# Altium PCB Power distribution system.PcbDoc
Units mm, origin at the board's own origin, x right, y up, seen from the top; angles counter-clockwise.
Board outline 242.49 x 145.36 mm, 2 copper layers (Top Layer, Bottom Layer), stack 2.57 mm thick; 38 components, 16 nets, 98 pads, 322 vias.
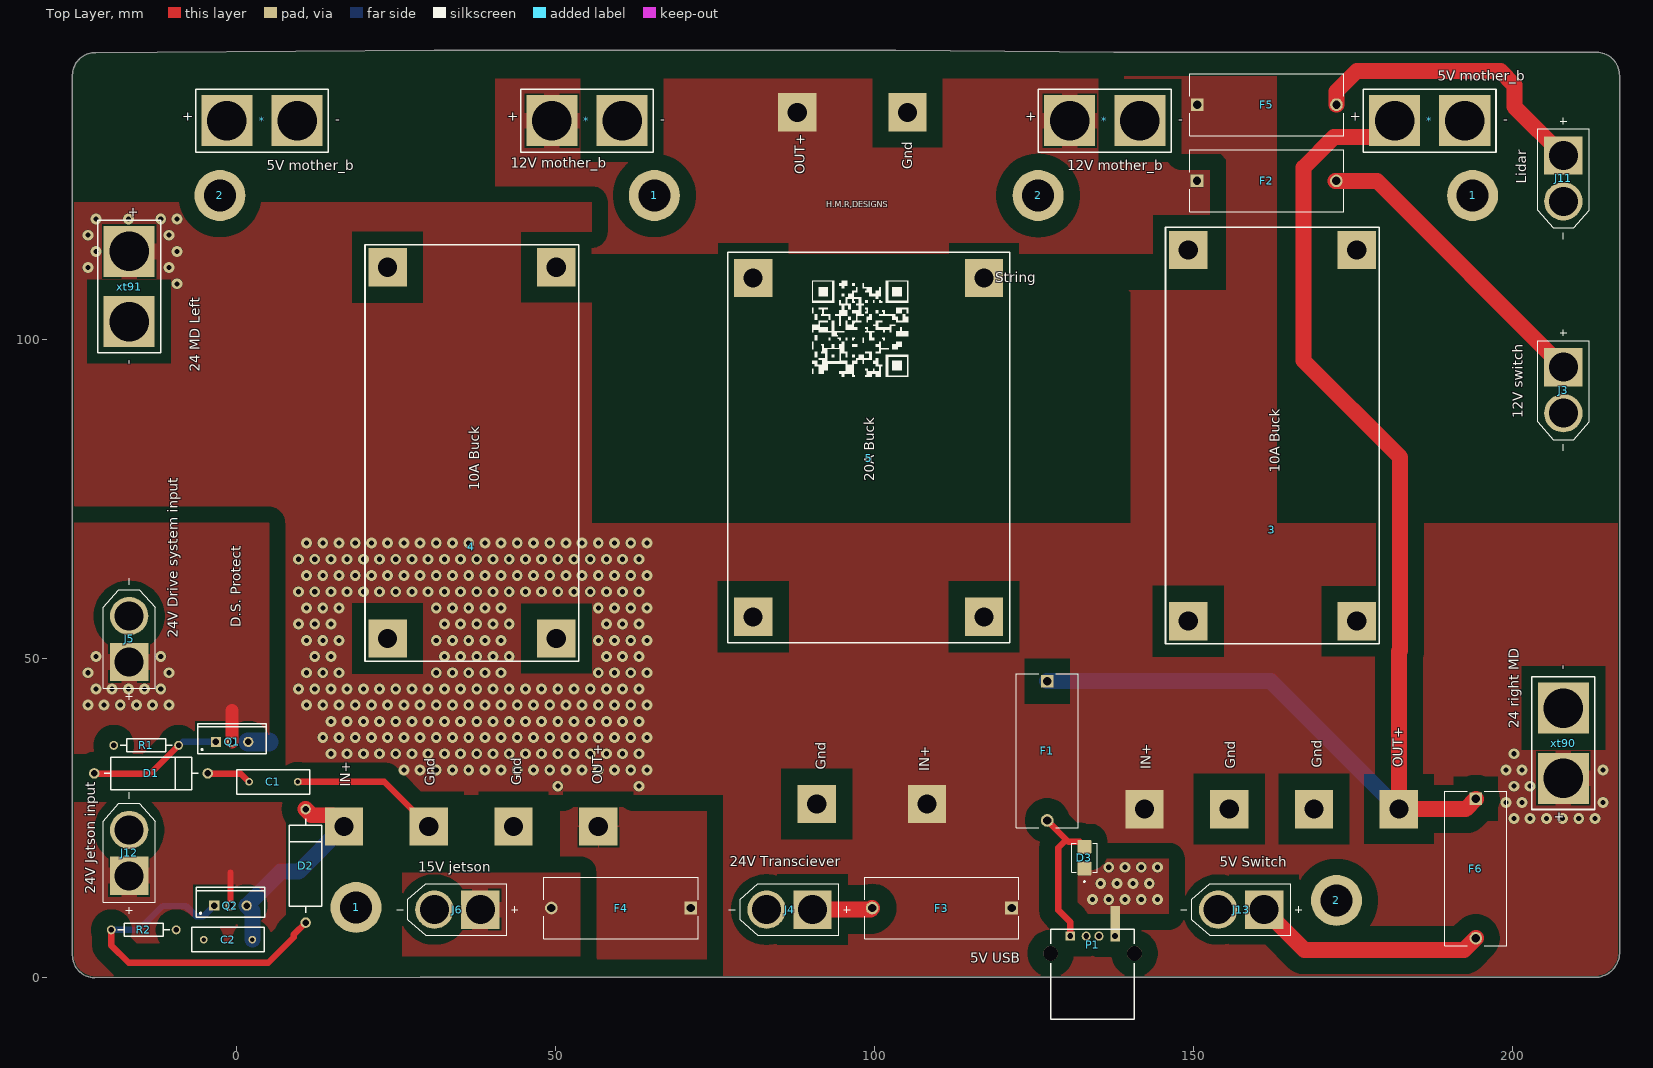
[diagram p0: Top Layer view]
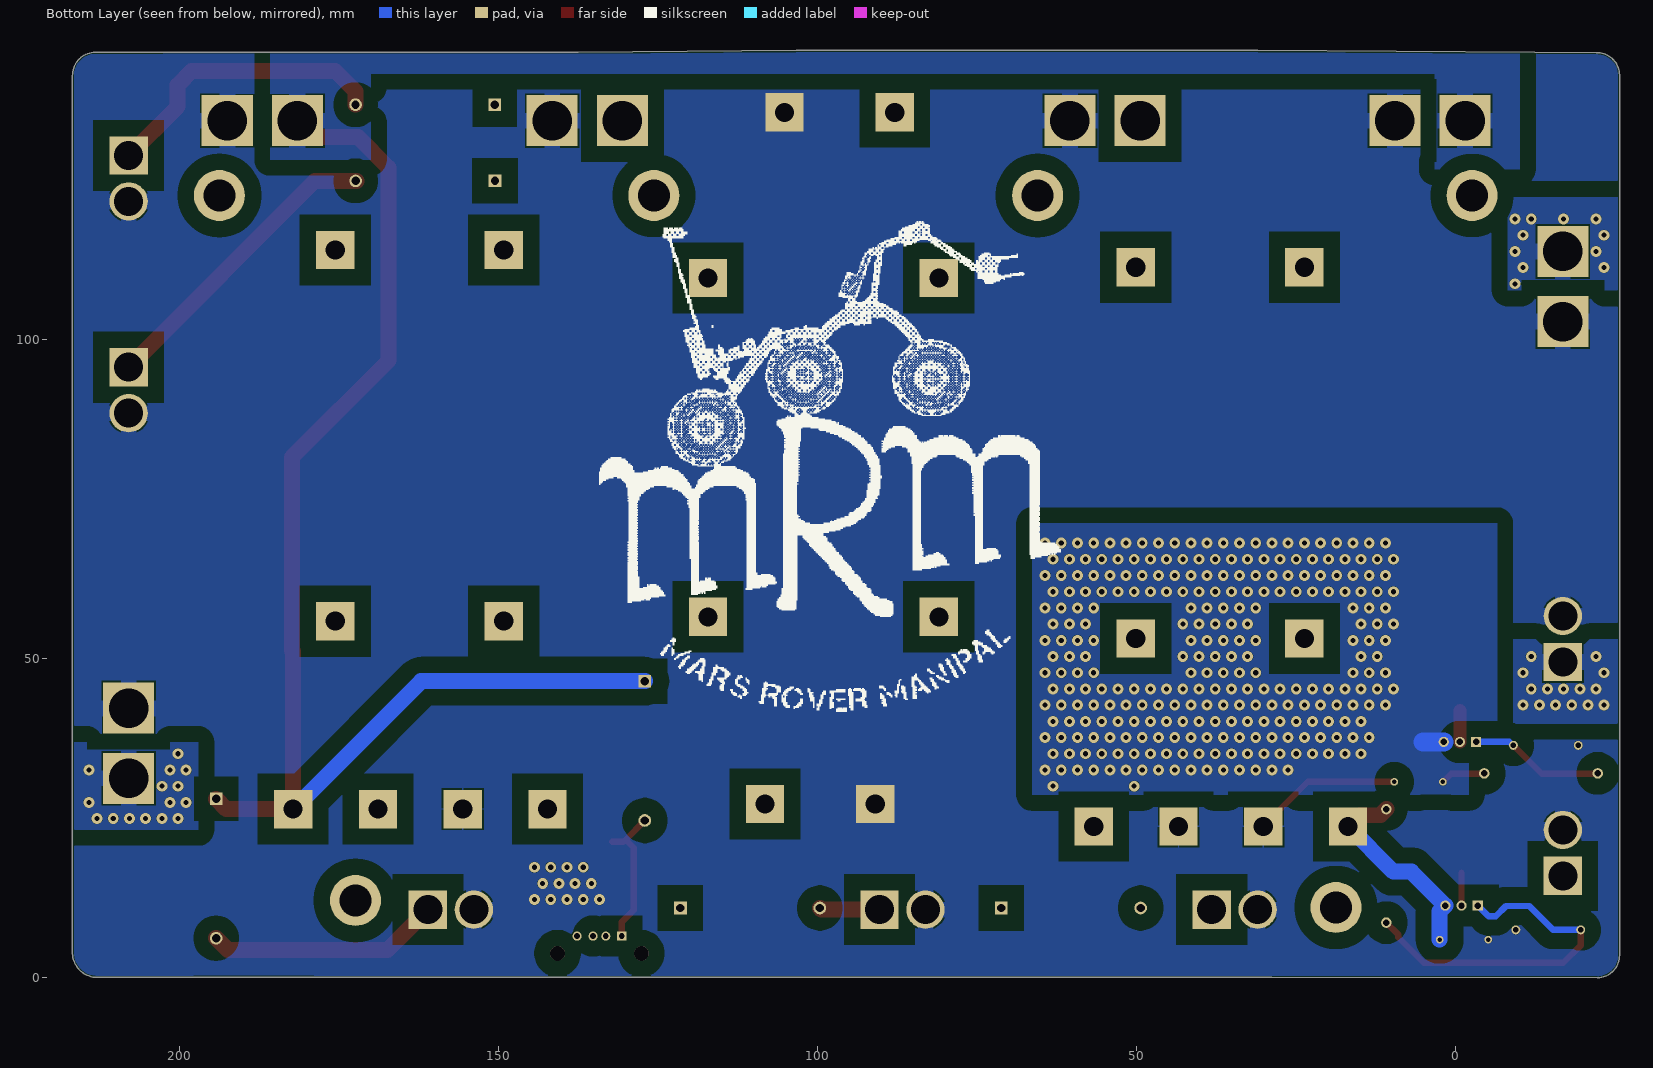
[diagram p1: Bottom Layer view, seen from below]

## Layer stack, top to bottom
Top Solder: solder mask 0.0102, Solder Resist, Dk 3.5
Top Layer: signal copper 0.105
Dielectric 1: dielectric 2.36, FR-4, Dk 4.8
Bottom Layer: signal copper 0.105
Bottom Solder: solder mask 0.0102, Solder Resist, Dk 3.5

## Board outline
-25.781,3.435 ccw(c-22.224,3.435) -22.343,-0.12 28.765,-0.044 178.816,-0.044 196.342,0 197.771,-0.011 202.057,-0.044 212.824,-0.044 ccw(c212.824,3.841) 216.707,3.719 216.701,141.275 ccw(c213.104,141.348) 213.175,144.945 202.438,144.99 179.53,144.99 137.41,144.99 103.253,145.244 30.93,145.244 -12.47,144.99 -22.163,144.898 ccw(c-22.227,141.351) -25.774,141.415

## Design rules (kind name [scope] priority, off if disabled: settings)
BoardOutlineClearance [All] p1: gap=0.254 ignorepadtopadclearanceinfootprint=FALSE except(0: Arc-SplitContinuation Track-SplitContinuation SMDPad-SplitContinuation THPad-SplitContinuation Via-SplitContinuation Fill-SplitContinuation Poly-SplitContinuation Region-SplitContinuation Text-SplitContinuation)
Clearance [All] p1: gap=2.54 ignorepadtopadclearanceinfootprint=FALSE except(0: Arc-Hole Track-Hole SMDPad-Hole THPad-Hole Via-Hole Fill-Hole Poly-Hole Region-Hole Text-Hole; 0.254: Arc-Via Arc-Text Track-Via Track-Text SMDPad-SMDPad SMDPad-THPad SMDPad-Via SMDPad-Text THPad-THPad THPad-Via THPad-Text Via-Via Via-Fill Via-Poly Via-Region Via-Text Fill-Text Poly-Text Region-Text Text-Text)
PlaneClearance [All] p1: clearance=2.54
PlaneConnect [All] p1: planeconnectstyle=Relief reliefexpansion=0.508 reliefentries=4 reliefconductorwidth=2.54 reliefairgap=0.254
PolygonConnect [InNetClass('All Nets') vs InNetClass('All Nets')] p1: connectstyle=Relief reliefconductorwidth=2.54 reliefentries=4 polygonreliefangle="90 Angle" airgapwidth=0.254
RoutingVias [All] p1: holewidth=0.711 width=1.27 viastyle="Through Hole" minholewidth=0.711 minwidth=1.27 maxholewidth=0.711 maxwidth=1.27
SolderMaskExpansion [All] p1: expansion=0.102 istentingtop=FALSE
Width Width_1 [All] p1: maxlimit=42.219 minlimit=1 preferedwidth=1 minimp=50.000000 maximp=50.000000 favimp=50.000000
28 further rules are at their usual default settings.

## Classes and differential pairs
component class Sheet3: 1 2 3 4 5 * C1 C2 D1 D2 D3 F1 F2 F3 F4 F5 F6 J3 J4 J5 J6 J11 J12 J13 P1 Q1 Q2 R1 R2 xt90 xt91

## Components (designator, comment, footprint, x,y, rotation, side; value= is the part's Value field where it differs from the comment)
1 "mountinghole_np" np_mountinghole#1 18.669,10.922 r90 top
1 "mountinghole_np" np_mountinghole#2 196.85,122.511 r90 top
1 "mountinghole_np" np_mountinghole#3 64.262,122.511 r90 top
2 "mountinghole_np" np_mountinghole#1 -2.667,122.511 r90 top
2 "mountinghole_np" np_mountinghole#1 125.585,122.511 r90 top
2 "mountinghole_np" np_mountinghole#4 178.816,12.021 r90 top
3 "Buck 10A" "Buck 10A" 175.514,52.236 r90 top
4 "Buck 10A" "Buck 10A" 50.038,49.533 r90 top locked
5 "Buck 20A" "Buck 20A" 87.828,135.536 r90 top
* "xt90" xt90 136.017,134.239 r0 top
* "xt90" xt90 186.944,134.239 r0 top
* "xt90" xt90 54.864,134.239 r0 top
* "xt90" xt90 3.937,134.239 r0 top
C1 "Cap" RAD-0.3 5.715,30.607 r180 top value=100pF
C2 "Cap" RAD-0.3 -1.397,5.881 r0 top value=100pF
D1 "D Zener" DIODE-0.7 -13.462,31.926 r0 top
D2 "D Zener" DIODE-0.7 10.768,17.438 r90 top
D3 "SMBJ36CA-13-F" DIONM4336X250N 132.842,18.72 r90 top
F1 "4527" FUSE_4527 127,35.472 r270 top
F2 "4527" FUSE_4527 161.4,124.797 r0 top
F3 "4527" FUSE_4527 110.49,10.834 r180 top
F4 "4527" FUSE_4527 60.198,10.834 r180 top
F5 "4527" FUSE_4527 161.417,136.735 r0 top
F6 "4527" FUSE_4527 194.183,17.018 r270 top
J3 "XT60-M" AMASS_XT60-M 207.899,91.992 r270 top
J4 "XT60-M" AMASS_XT60-M 86.614,10.58 r180 top
J5 "XT60-M" AMASS_XT60-M -16.891,53.003 r90 top
J6 "XT60-M" AMASS_XT60-M 34.544,10.58 r180 top
J11 "XT60-M" AMASS_XT60-M 207.899,125.183 r270 top
J12 "XT60-M" AMASS_XT60-M -16.891,19.468 r90 top
J13 "XT60-M" AMASS_XT60-M 157.397,10.58 r180 top
P1 "USB-A1HSW6" OST_USB-A1HSW6 134.112,-0.088 r0 top
Q1 "PMOS-2" TO-220AB -0.762,36.869 r0 top
Q2 "PMOS-2" TO-220AB -1.016,11.215 r0 top
R1 "Res2" AXIAL-0.4 -14.224,36.322 r0 top value=1K
R2 "Res2" AXIAL-0.4 -14.605,7.405 r180 top value=1K
xt90 "xt90" xt90 207.899,36.664 r90 top
xt91 "xt90" xt90 -16.891,108.243 r270 top

## Footprints (in the part's own frame and the unit in brackets; to place one, negate y for a bottom-side part, rotate by r counter-clockwise, add the part's x,y. Pads: shape width x height; smd on the part's side, far side on the other; paste and mask are expansions set on the pad)
AMASS_XT60-M [mm]
  round 6 hole 4.55: N(3.6,0)
  rect 6x6 hole 4.55: P(-3.6,0)
  silkscreen extent -9.5,-4.05 9.5,4.05, body extent -4.05,0 4.05,20.5, height 7.75
AXIAL-0.4 [mm] "Axial Device, Thru-Hole; 2 Leads; 0.4 in Pin Spacing"
  round 1.4 hole 0.85: 1(-5.08,0) 2(5.08,0)
  silkscreen extent -4.06,-1.02 4.06,1.02
"Buck 10A" [mm]
  rect 6x6 hole 3 unplated: 1(3.556,26.416) 2(3.556,0) 3(61.722,26.416) 4(61.722,0)
  rect 6x6 hole 3: 20(-25.908,33.274) 21(-25.908,19.981) 22(-25.908,6.689) 23(-25.908,-6.604)
  silkscreen extent 0,-3.56 65.28,29.97
"Buck 20A" [mm]
  rect 6x6 hole 3 unplated: 1(-79.065,6.914) 2(-79.065,-29.266) 3(-25.945,6.914) 4(-25.945,-29.266)
  rect 6x6 hole 3: 24(-108.385,-20.32) 25(0,0) 26(-108.385,-3.048) 27(0,-17.272)
  silkscreen extent -83.11,-33.27 -21.9,10.92
DIODE-0.7 [mm] "Diode, Thru-Hole; 2 Leads; 0.7 in Pin Spacing"
  round 1.65 hole 1: 1(-8.89,0) 2(8.89,0)
  silkscreen extent -7.37,-2.54 7.37,2.54
DIONM4336X250N [mm]
  rrect15% 2.22x2.13 smd: 1(-1.68,0) 2(1.68,0)
  silkscreen extent -3.85,-1.97 2.28,1.97
FUSE_4527 [mm]
  rect 1.98x1.98 hole 1.32: 1(-10.92,0)
  round 1.98 hole 1.32: 2(10.92,0)
  silkscreen extent -12.08,-4.85 12.08,4.85
np_mountinghole#1 [mm]
  round 8 hole 5 unplated: MH_NP_6mm(0,0)
np_mountinghole#2 [mm]
  round 8 hole 5 unplated: MH_NP_6mm(0,3.175)
np_mountinghole#3 [mm]
  round 8 hole 5 unplated: MH_NP_6mm(0,-1.161)
np_mountinghole#4 [mm]
  round 8 hole 5 unplated: ""(0,6.477)
OST_USB-A1HSW6 [mm]
  rect 1.428x1.428 / inner round 1.428 / far side rect 1.428x1.428 hole 0.92: 1(-3.5,6.51)
  round 1.428 hole 0.92: 2(-1,6.51) 3(1,6.51) 4(3.5,6.51)
  round 2.3 hole 2.3 unplated: ""(-6.57,3.8) ""(6.57,3.8)
  silkscreen extent -6.55,-6.5 6.55,7.6, body extent -7.9,0 7.9,14.1, height 3.56
RAD-0.3 [mm] "Radial Cap, Thru-Hole; 2 Leads; 0.3 in Pin Spacing"
  round 1.2 hole 0.7: 1(-3.81,0) 2(3.81,0)
  silkscreen extent -5.71,-1.91 5.71,1.91
TO-220AB [mm] "TO, Thru-Hole, Vertical, Heatsink Mounted; 3 In-Line Leads; Pitch 2.54 mm"
  rect 1.6x1.6 hole 1: 1(-2.54,0)
  round 1.6 hole 1: 2(0,0) 3(2.54,0)
  silkscreen extent -5.35,-1.85 5.35,2.85, body extent -5.4,-1.9 5.4,2.9, height 19.3
xt90 [mm]
  rect 8x8 hole 6.2: 1(-5.5,0) 2(5.5,0)
  silkscreen extent -10.4,-4.95 10.4,4.95

## Part data
C1 C2: "Capacitor", LatestRevisionDate=17-Jul-2002, LatestRevisionNote="Re-released for DXP Platform.", PackageDescription="Radial Cap, Thru-Hole; 2 Leads; 0.3 in Pin Spacing", PackageReference=RAD-0.3, Published=8-Jun-2000, Publisher="Altium Limited"
D1 D2: "Zener Diode", LatestRevisionDate=17-Jul-2002, LatestRevisionNote="Re-released for DXP Platform.", PackageDescription="Diode, Thru-Hole; 2 Leads; 0.7 in Pin Spacing", PackageReference=DIODE-0.7, Published=8-Jun-2000, Publisher="Altium Limited"
D3: "SMBJ36CA Series 600 W 36 V Surface Mount Bi-Directional TVS Diode - DO-214AA", Package=None, Availability=Unavailable, MP=SMBJ36CA-13-F, Price=None
F1 F2 F3 F4 F5 F6: "Fuseholder; 5 A; 250 V; Nylon; Base only; Brass, Tin Plate (Contact)", Package=None, Availability=Unavailable, MP=4527, Price=None
J3 J4 J5 J6 J11 J12 J13: "Plug; DC supply; XT60; male; PIN: 2; for cable; soldered; 30A; 500V", Package=Package, Availability="Not in stock", Check_prices=https://www.snapeda.com/parts/XT60-M/AMASS/view-part/?ref=eda, MF=AMASS, MP=XT60-M, Price=None, SnapEDA_Link=https://www.snapeda.com/parts/XT60-M/AMASS/view-part/?ref=snap
P1: "USB-A (USB TYPE-A) - Receptacle Connector 4 Position Through Hole, Right Angle", Package=None, Availability="In Stock", Check_prices=https://www.snapeda.com/parts/USB-A1HSW6/On+Shore+Technology+Inc./view-part/?ref=eda, MF="On Shore", MP=USB-A1HSW6, Price=None, Purchase-URL=https://pricing.snapeda.com/search/part/USB-A1HSW6/?ref=eda, SnapEDA_Link=https://www.snapeda.com/parts/USB-A1HSW6/On+Shore+Technology+Inc./view-part/?ref=snap
Q1 Q2: "P-Channel Power MOSFET", ComponentLink1Description="Manufacturer Link", ComponentLink1URL=http://www.irf.com/, DatasheetVersion=PD-9.390D, LatestRevisionDate=17-Jul-2002, LatestRevisionNote="Re-released for DXP Platform.", Note="Pin 4 not drawn and electrically connected to Pin 2.", PackageDescription="TO, Thru-Hole, Vertical, Heatsink Mounted; 3 In-Line Leads; Pitch 2.54 mm", PackageReference=TO-220AB, PackageVersion=Feb-1997, Published=8-Jun-2000, Publisher="Altium Limited"
R1 R2: "Resistor", LatestRevisionDate=17-Jul-2002, LatestRevisionNote="Re-released for DXP Platform.", PackageDescription="Axial Device, Thru-Hole; 2 Leads; 0.4 in Pin Spacing", PackageReference=AXIAL-0.4, Published=8-Jun-2000, Publisher="Altium Limited"

## Free pads (board coordinates)
  rect 11x13 on Top Solder: 3(-1.016,20.867) 3(-0.762,46.521)
  rect 1.524x5.524 smd: 12(137.668,8.382)
  rect 6x13 on Bottom Solder: 13(3.937,35.179)

## Via types
v1: diameter 1.7, hole 0.8, Top Layer to Bottom Layer, 322 vias

## Nets (pads, with @x,y where several pads share a name; then routed paths per layer and width w, separated by ;. In a path a pad name is that pad's centre, name@x,y a point inside that pad or via, vN(x,y) a via of type N, cw(c..) or ccw(c..) an arc to the next point about the centre after c; other vN are vias at no path point)
"5 after buck": 3.23 *.1@181.444,134.239 *.1@-1.563,134.239 F1.1 F6.1 | length 202.7
  Top Layer w2.5: *.1@179.325,131.695 *.1@180.931,133.301 ; *.1@181.444,134.239 178.9,131.695 171.98,131.695 167.17,126.885 167.17,96.62 182.304,81.486 182.304,51.222 182.118,51.036 3.23 192.573,26.328 F6.1
  Bottom Layer w2.5: F1.1 162.054,46.392 3.23
"10A Jet": F4.2 J6.P
"10A Lidar": F5.2 J11.P | length 46.4
  Top Layer w2.5: F5.2 172.336,136.736 172.336,138.808 175.557,142.029 198.014,142.029 200.234,139.809 200.234,136.448 J11.P
"10A S": F2.2 J3.P | length 47.8
  Top Layer w2.5: F2.2@172.21,124.797 178.694,124.797 J3.P
"10A Switch": F6.2 J13.P | length 36.6
  Top Layer w2.5: J13.P 167.346,4.231 192.316,4.231 F6.2
"10A trans": F3.2 J4.P | length 9.5
  Top Layer w2.5: J4.P 99.316,10.58 F3.2
18+: 4.23 F4.1
"18V after mosfet": 4.20 C2.2 D2.2 Q2.3 | length 33.2
  Top Layer w2.5: D2.2 11.721,25.375 15.014,25.375 4.20
  Bottom Layer w2.5: C2.2 2.413,10.326 Q2.3 6.854,16.545 9.684,16.545 4.20
"20A after buck": 5.25 *.1@49.364,134.239 *.1@130.517,134.239 F2.1
"24V after Mosfet": 3.20 5.24 C1.2 D1.2 F3.1 F5.1 Q1.3 xt90.1 xt91.1 | length 10.3
  Top Layer w1: D1.2@-4.572,31.877 0.581,31.877 1.851,30.607 C1.2
  Bottom Layer w1: 4.992,36.869 5.08,36.957
  Bottom Layer w3: Q1.3 4.992,36.869
  other v1: 200.152,24.848 202.692,24.848 205.232,24.848 207.772,24.848 210.312,24.848 212.852,24.848 198.882,27.388 201.422,27.388 214.122,27.388 50.292,29.928 62.992,29.928 200.152,29.928 202.692,29.928 26.162,32.468 28.702,32.468 31.242,32.468 33.782,32.468 36.322,32.468 38.862,32.468 41.402,32.468 43.942,32.468 46.482,32.468 49.022,32.468 51.562,32.468 54.102,32.468 56.642,32.468 59.182,32.468 61.722,32.468 64.262,32.468 198.882,32.468 201.422,32.468 214.122,32.468 14.732,35.008 17.272,35.008 19.812,35.008 22.352,35.008 24.892,35.008 27.432,35.008 29.972,35.008 32.512,35.008 35.052,35.008 37.592,35.008 40.132,35.008 42.672,35.008 45.212,35.008 47.752,35.008 50.292,35.008 52.832,35.008 55.372,35.008 57.912,35.008 60.452,35.008 62.992,35.008 200.152,35.008 13.462,37.548 16.002,37.548 18.542,37.548 21.082,37.548 23.622,37.548 26.162,37.548 28.702,37.548 31.242,37.548 33.782,37.548 36.322,37.548 38.862,37.548 41.402,37.548 43.942,37.548 46.482,37.548 49.022,37.548 51.562,37.548 54.102,37.548 56.642,37.548 59.182,37.548 61.722,37.548 64.262,37.548 14.732,40.088 17.272,40.088 19.812,40.088 22.352,40.088 24.892,40.088 27.432,40.088 29.972,40.088 32.512,40.088 35.052,40.088 37.592,40.088 40.132,40.088 42.672,40.088 45.212,40.088 47.752,40.088 50.292,40.088 52.832,40.088 55.372,40.088 57.912,40.088 60.452,40.088 62.992,40.088 10.922,42.628 13.462,42.628 16.002,42.628 18.542,42.628 21.082,42.628 23.622,42.628 26.162,42.628 28.702,42.628 31.242,42.628 33.782,42.628 36.322,42.628 38.862,42.628 41.402,42.628 43.942,42.628 46.482,42.628 49.022,42.628 51.562,42.628 54.102,42.628 56.642,42.628 59.182,42.628 61.722,42.628 64.262,42.628 9.652,45.168 12.192,45.168 14.732,45.168 17.272,45.168 19.812,45.168 22.352,45.168 24.892,45.168 27.432,45.168 29.972,45.168 32.512,45.168 35.052,45.168 37.592,45.168 40.132,45.168 42.672,45.168 45.212,45.168 47.752,45.168 50.292,45.168 52.832,45.168 55.372,45.168 57.912,45.168 60.452,45.168 62.992,45.168 10.922,47.708 13.462,47.708 16.002,47.708 31.242,47.708 33.782,47.708 36.322,47.708 38.862,47.708 41.402,47.708 56.642,47.708 59.182,47.708 61.722,47.708 64.262,47.708 12.192,50.248 14.732,50.248 32.512,50.248 35.052,50.248 37.592,50.248 40.132,50.248 42.672,50.248 57.912,50.248 60.452,50.248 62.992,50.248 10.922,52.788 13.462,52.788 16.002,52.788 31.242,52.788 33.782,52.788 36.322,52.788 38.862,52.788 41.402,52.788 56.642,52.788 59.182,52.788 61.722,52.788 64.262,52.788 9.652,55.328 12.192,55.328 14.732,55.328 32.512,55.328 35.052,55.328 37.592,55.328 40.132,55.328 42.672,55.328 57.912,55.328 60.452,55.328 62.992,55.328 10.922,57.868 13.462,57.868 16.002,57.868 31.242,57.868 33.782,57.868 36.322,57.868 38.862,57.868 41.402,57.868 56.642,57.868 59.182,57.868 61.722,57.868 64.262,57.868 9.652,60.408 12.192,60.408 14.732,60.408 17.272,60.408 19.812,60.408 22.352,60.408 24.892,60.408 27.432,60.408 29.972,60.408 32.512,60.408 35.052,60.408 37.592,60.408 40.132,60.408 42.672,60.408 45.212,60.408 47.752,60.408 50.292,60.408 52.832,60.408 55.372,60.408 57.912,60.408 60.452,60.408 62.992,60.408 10.922,62.948 13.462,62.948 16.002,62.948 18.542,62.948 21.082,62.948 23.622,62.948 26.162,62.948 28.702,62.948 31.242,62.948 33.782,62.948 36.322,62.948 38.862,62.948 41.402,62.948 43.942,62.948 46.482,62.948 49.022,62.948 51.562,62.948 54.102,62.948 56.642,62.948 59.182,62.948 61.722,62.948 64.262,62.948 9.652,65.488 12.192,65.488 14.732,65.488 17.272,65.488 19.812,65.488 22.352,65.488 24.892,65.488 27.432,65.488 29.972,65.488 32.512,65.488 35.052,65.488 37.592,65.488 40.132,65.488 42.672,65.488 45.212,65.488 47.752,65.488 50.292,65.488 52.832,65.488 55.372,65.488 57.912,65.488 60.452,65.488 62.992,65.488 10.922,68.028 13.462,68.028 16.002,68.028 18.542,68.028 21.082,68.028 23.622,68.028 26.162,68.028 28.702,68.028 31.242,68.028 33.782,68.028 36.322,68.028 38.862,68.028 41.402,68.028 43.942,68.028 46.482,68.028 49.022,68.028 51.562,68.028 54.102,68.028 56.642,68.028 59.182,68.028 61.722,68.028 64.262,68.028 -9.398,108.668 -23.368,111.208 -10.668,111.208 -22.098,113.748 -9.398,113.748 -23.368,116.288 -10.668,116.288 -22.098,118.828 -17.018,118.828 -11.938,118.828 -9.398,118.828
"24V drain drive": J5.P Q1.2 | length 4.9
  Top Layer w2: Q1.2 -0.762,41.783
  other v1: -23.368,42.628 -20.828,42.628 -18.288,42.628 -15.748,42.628 -13.208,42.628 -10.668,42.628 -22.098,45.168 -19.558,45.168 -17.018,45.168 -14.478,45.168 -11.938,45.168 -23.368,47.708 -10.668,47.708 -22.098,50.248 -11.938,50.248
"24V drain jetson": J12.P Q2.2 | length 5.2
  Top Layer w1: Q2.2 -1.016,16.383
GND: 3.21 4.21 4.22 5.26 5.27 *.2 C1.1 C2.1 D3.1 J3.N J4.N J5.N J6.N J11.N J12.N J13.N P1.4 pad.12 R1.1 R2.1 xt90.2 xt91.2 | length 23.4
  Top Layer w1: C1.1 9.536,30.618 23.064,30.618 4.21
  other v1: 134.112,12.148 136.652,12.148 139.192,12.148 141.732,12.148 144.272,12.148 135.382,14.688 137.922,14.688 140.462,14.688 143.002,14.688 136.652,17.228 139.192,17.228 141.732,17.228 144.272,17.228
"jetson mosfet gate": D2.1 Q2.1 R2.2 | length 56
  Top Layer w1: R2.2 -19.685,4.953 -16.973,2.241 4.908,2.241 8.893,6.226 8.893,6.672 D2.1
  Bottom Layer w1: R2.2 -15.35,7.405 -11.61,11.145 -7.976,11.145 -6.352,9.521 -5.25,9.521 Q2.1
"Mosfet gate": D1.1 Q1.1 R1.2 | length 21.1
  Top Layer w1: D1.1@-22.352,31.877 -13.589,31.877 R1.2
  Bottom Layer w1: R1.2 -9.036,36.322 -8.489,36.869 Q1.1
usb-A-5A: D3.2 F1.2 P1.1 | length 22.9
  Top Layer w1: F1.2 130.005,21.547 ; P1.1 130.612,8.636 128.737,10.511 128.737,20.279 130.005,21.547 ; D3.2@132.08,21.19 130.362,21.19 130.005,21.547
pads on no net: 1.MH_NP_6mm 2. 2.MH_NP_6mm 3.1 3.2 3.3 3.4 3.22 4.1 4.2 4.3 4.4 5.1 5.2 5.3 5.4 P1. P1.2 P1.3

## Polygon pours and split planes (outlines as drawn)
"24V drain jetson" on Top Layer "24V_DRAIN_JETSON_L01_P008" (solid, pour order 8): -25.781,27.432 7.62,27.432 7.62,-0.127 -25.781,-0.127
"24V drain drive" on Top Layer "24V_DRAIN_DRIVE_L01_P003" (solid, pour order 3): -25.908,71.247 8.128,71.247 8.128,34.798 -25.781,35.052
"24V after Mosfet" on Top Layer "24V_AFTER_MOSFET_L01_P022" (solid, pour order 22): 7.62,71.12 216.662,71.12 216.662,0.254 76.2,0.254 76.2,28.575 7.62,28.575
"24V after Mosfet" on Top Layer "24V_AFTER_MOSFET_L01_P005" (solid, pour order 5): -25.781,71.12 7.62,71.12 7.62,42.037 7.747,41.91 55.626,41.91 55.626,121.412 -25.781,121.412
"20A after buck" on Top Layer "20A_AFTER_BUCK_L01_P014" (solid, pour order 14): 40.513,140.716 40.513,140.843 154.305,140.843 154.305,113.411 144.018,113.411 40.513,113.411 40.513,140.589
"24V after Mosfet" on Top Layer "24V_AFTER_MOSFET_L01_P013" (solid, pour order 13): 139.065,141.224 139.065,129.032 154.178,129.032 155.067,128.143 155.067,107.696 139.7,107.696 140.081,107.315 140.081,41.275 167.894,41.275 162.941,46.228 162.941,141.224 139.192,141.224
18+ on Top Layer "18+_L01_P016" (solid, pour order 16): 50.927,27.432 51.181,27.432 75.565,27.432 75.565,2.794 50.673,2.794 50.673,27.432
"10A Jet" on Top Layer "10A_JET_L01_P015" (solid, pour order 15): 25.908,16.383 26.035,16.383 53.848,16.383 53.848,3.302 25.908,3.302 25.908,16.256
GND on Top Layer "GND_L01_P012" (solid, pour order 12): 130.683,18.542 146.05,18.542 146.05,9.906 145.542,9.906 130.683,9.906
GND on Bottom Layer "GND_L02_P021" (solid, pour order 21): -25.527,0.254 -25.146,-0.127 216.662,-0.127 216.662,144.907 -29.845,144.907 -29.845,3.048 -26.416,-0.381
"24V after Mosfet" on Bottom Layer "24V_AFTER_MOSFET_L02_P002" (solid, pour order 2): -6.604,70.612 -6.604,39.624 -2.159,39.624 -2.159,28.575 66.294,28.575 66.294,71.12 -6.604,71.12
"24V after Mosfet" on Bottom Layer "24V_AFTER_MOSFET_L02_P006" (solid, pour order 6): -25.654,107.632 -25.527,107.632 -8.255,107.632 -8.255,122.237 -25.781,122.237 -25.781,107.632
"24V after Mosfet" on Bottom Layer "24V_AFTER_MOSFET_L02_P010" (solid, pour order 10): 216.789,36.83 216.789,23.368 216.535,23.114 196.977,23.114 196.977,36.83 196.977,23.114 196.977,36.83
"5 after buck" on Bottom Layer "5_AFTER_BUCK_L02_P017" (solid, pour order 17): 3.175,126.619 -10.16,126.619 -10.16,145.034 185.674,145.034 185.674,128.27 185.674,128.143 169.926,128.143 169.926,141.224 169.926,141.605 3.175,141.605
"24V drain drive" on Bottom Layer "24V_DRAIN_DRIVE_L02_P004" (solid, pour order 4): -6.731,52.959 -6.731,39.751 -25.781,39.751 -25.781,52.959

## Silkscreen, mask and mechanical layers (free items; w line width, h text height)
Top Overlay:
  drawing of 44 lines, arcs and shapes, not listed
  text "5V mother_b" at 188.214,140.462 h1.52
  text "12V mother_b" at 42.926,126.873 h1.52
  text "5V mother_b" at 4.699,126.492 h1.52
  text "12V mother_b" at 130.175,126.492 h1.52
  text "Lidar" at 202.057,124.333 h1.52 r90
  text "H.M.R,DESIGNS" at 92.329,120.335 h1.52
  text "String" at 118.872,108.922 h1.52
  text "24 MD Left" at -5.842,94.869 h1.52 r90
  text "12V switch" at 201.549,87.63 h1.52 r90
  text "D.S. Protect" at 0.635,54.864 h1.52 r90
  text "24V Drive system input" at -9.271,53.213 h1.52 r90
  text "24 right MD" at 200.914,38.989 h1.52 r90
  text "24V Transciever" at 77.216,17.399 h1.52
  text "5V Switch" at 154.051,17.272 h1.52
  text "15V jetson" at 28.448,16.51 h1.52
  text "24V Jetson input" at -22.225,13.037 h1.52 r90
  text "5V USB" at 114.935,2.286 h1.52
Bottom Overlay:
  drawing of 61 lines, arcs and shapes, not listed
Mechanical 15:
  lines w0.254: 196.342,0 196.342,0 ; 196.342,0 197.771,-0.011 202.057,-0.044 212.824,-0.044 ccw(c212.824,3.841) 216.707,3.719 216.701,141.275 ccw(c213.104,141.348) 213.175,144.945 202.438,144.99 179.53,144.99 137.41,144.99 103.253,145.244 30.93,145.244 -12.47,144.99 -22.163,144.898 ccw(c-22.227,141.351) -25.774,141.415 -25.781,3.435 ccw(c-22.224,3.435) -22.343,-0.12 28.765,-0.044 133.794,-0.044 178.816,-0.044 196.342,0

## Text inside footprints (layer, text, board x,y; h text height)
3: Top Overlay "IN+" at 143.256,32.551 h1.52 r90; Top Overlay "Gnd" at 156.464,32.678 h1.52 r90; Top Overlay "OUT+" at 182.753,32.932 h1.52 r90; Top Overlay "Gnd" at 170.053,32.805 h1.52 r90; Top Overlay "10A Buck" at 163.449,79.033 h1.52 r90
4: Top Overlay "IN+" at 17.78,29.848 h1.52 r90; Top Overlay "Gnd" at 30.988,29.975 h1.52 r90; Top Overlay "OUT+" at 57.277,30.229 h1.52 r90; Top Overlay "Gnd" at 44.577,30.102 h1.52 r90; Top Overlay "10A Buck" at 37.973,76.33 h1.52 r90
5: Top Overlay "Gnd" at 92.273,32.485 h1.52 r90; Top Overlay "IN+" at 108.529,32.231 h1.52 r90; Top Overlay "20A Buck" at 99.893,77.697 h1.52 r90; Top Overlay "OUT+" at 88.971,125.83 h1.52 r90; Top Overlay "Gnd" at 105.862,126.646 h1.52 r90
*: Top Overlay "+" at 123.521,134.239 h1.52; Top Overlay "-" at 147.521,133.731 h1.52
*: Top Overlay "+" at 174.448,134.239 h1.52; Top Overlay "-" at 198.448,133.731 h1.52
*: Top Overlay "+" at 42.368,134.239 h1.52; Top Overlay "-" at 66.368,133.731 h1.52
*: Top Overlay "+" at -8.559,134.239 h1.52; Top Overlay "-" at 15.441,133.731 h1.52
xt90: Top Overlay "-" at 208.407,48.168 h1.52 r90; Top Overlay "+" at 207.899,24.168 h1.52 r90
xt91: Top Overlay "-" at -17.399,96.739 h1.52 r270; Top Overlay "+" at -16.891,120.739 h1.52 r270